# Altium PCB Copy of PCB2.PcbDoc
Units mm, origin at the board's own origin, x right, y up, seen from the top; angles counter-clockwise.
Board outline 80 x 40 mm, 2 copper layers (Top Layer, Bottom Layer); 53 components, 37 nets, 214 pads, 63 vias.
Unrouted connection lines stored in the file: 11.
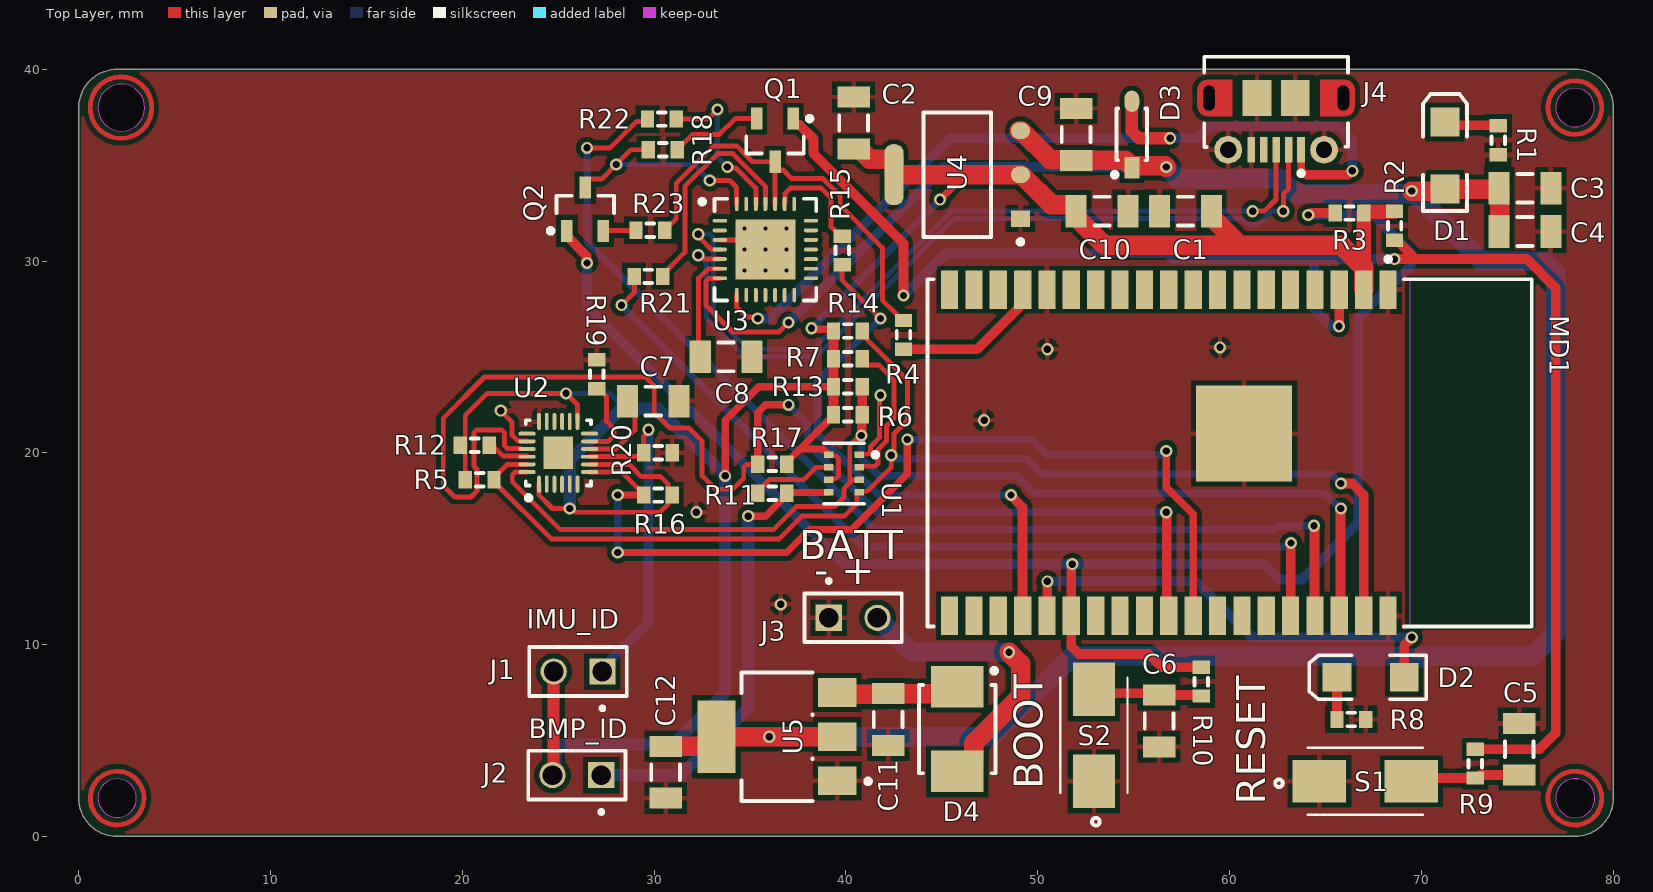
[diagram p0: Top Layer view]
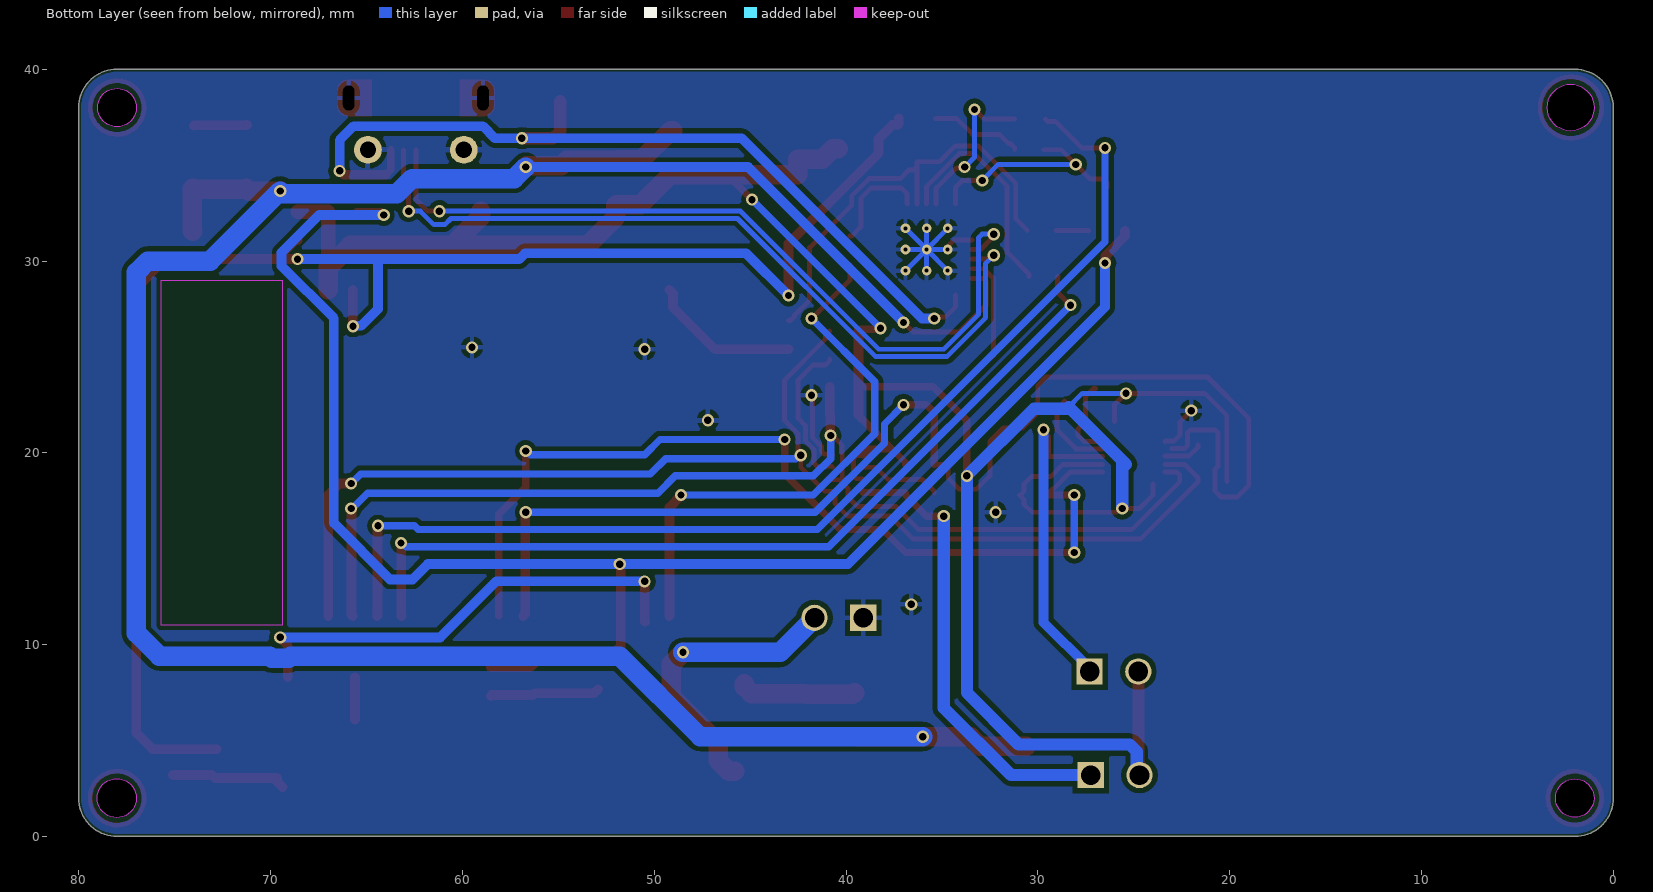
[diagram p1: Bottom Layer view, seen from below]

## Layer stack, top to bottom
Top Solder: solder mask 0.0102, Solder Resist, Dk 3.5
Top Layer: signal copper 0.0356
Dielectric 1: dielectric 0.32, FR-4, Dk 4.8
Bottom Layer: signal copper 0.0356
Bottom Solder: solder mask 0.0102, Solder Resist, Dk 3.5

## Board outline
0,2 ccw(c2,2) 2,0 78,0 ccw(c78,2) 80,2 80,38 ccw(c78,38) 78,40 2,40 ccw(c2,38) 0,38
cut-out: 77,2 ccw(c78.02,2) 78.02,0.98 ccw(c78.02,2) 79.04,2 ccw(c78.02,2) 78.02,3.02 ccw(c78.02,2)
cut-out: 77,38 ccw(c78.005,38) 78.005,36.995 ccw(c78.005,38) 79.01,38 ccw(c78.005,38) 78.005,39.005 ccw(c78.005,38)
cut-out: 1,2 ccw(c2.005,2) 2.005,0.995 ccw(c2.005,2) 3.01,2 ccw(c2.005,2) 2.005,3.005 ccw(c2.005,2)
cut-out: 1,38 ccw(c2.221,38) 2.221,36.779 ccw(c2.221,38) 3.441,38 ccw(c2.221,38) 2.221,39.221 ccw(c2.221,38)

## Design rules (kind name [scope] priority, off if disabled: settings)
BoardOutlineClearance [All] p1: gap=0.127 ignorepadtopadclearanceinfootprint=FALSE except(0: Arc-SplitContinuation Track-SplitContinuation SMDPad-SplitContinuation THPad-SplitContinuation Via-SplitContinuation Fill-SplitContinuation Poly-SplitContinuation Region-SplitContinuation Text-SplitContinuation)
Clearance 5V_Special [InNet('+5')] p1 off: gap=0.254 ignorepadtopadclearanceinfootprint=FALSE except(0: Arc-Hole Track-Hole SMDPad-Hole THPad-Hole Via-Hole Fill-Hole Poly-Hole Region-Hole Text-Hole; 0.508: Arc-Arc Arc-Track Track-Track)
Clearance Vbat_Special [InNet('Vbat')] p2 off: gap=0.254 ignorepadtopadclearanceinfootprint=FALSE except(0: Arc-Hole Track-Hole SMDPad-Hole THPad-Hole Via-Hole Fill-Hole Poly-Hole Region-Hole Text-Hole; 0.508: Arc-Arc Arc-Track Track-Track)
Clearance [All] p3: gap=0.254 ignorepadtopadclearanceinfootprint=FALSE except(0: Arc-Hole Track-Hole SMDPad-Hole THPad-Hole Via-Hole Fill-Hole Poly-Hole Region-Hole Text-Hole; 0.127: Arc-Arc Arc-Track Arc-SMDPad Track-Track Track-SMDPad SMDPad-SMDPad)
MinimumSolderMaskSliver MinimumSolderMaskSliver_1 [All] p1: minsoldermaskwidth=0.025
MinimumSolderMaskSliver [All] p2: minsoldermaskwidth=0.254
PolygonConnect [All] p1: connectstyle=Relief reliefconductorwidth=0.254 reliefentries=4 polygonreliefangle="90 Angle" airgapwidth=0.254
RoomDefinition ESP32WROVER [InComponentClass('ESP32WROVER')] p1: confinementstyle=ConfineOut formatcopy=TRUE lockcomponents=FALSE outline -2.6,28.2 -18.9,28.2 -18.9,40 -2.6,40
RoutingVias RoutingViasS [All] p1: holewidth=0.381 width=0.762 viastyle="Through Hole" minholewidth=0.254 minwidth=0.508 maxholewidth=1.27 maxwidth=1.778
RoutingVias [All] p2: holewidth=0.711 width=1.27 viastyle="Through Hole" minholewidth=0.711 minwidth=1.27 maxholewidth=0.711 maxwidth=1.27
SilkToSolderMaskClearance SilkToSolderMaskClearance_1 [IsPad] p1: minsilkscreentomaskgap=0.076 clearancetoexposedcopper=TRUE
SilkToSolderMaskClearance [IsPad] p2: minsilkscreentomaskgap=0.254 clearancetoexposedcopper=TRUE
SolderMaskExpansion [All] p1: expansion=0.102 istentingtop=FALSE
UnRoutedNet [All] p1: checkbadconnections=TRUE
Width [All] p1: maxlimit=2.54 minlimit=0.254 preferedwidth=0.508
27 further rules are at their usual default settings.

## Components (designator, comment, footprint, x,y, rotation, side; value= is the part's Value field where it differs from the comment)
C1 "Cap Semi" C1206 57.704,32.6 r0 top value=100uF
C2 "Cap Semi" C1206 40.4,37.2 r270 top value=1uF
C3 "Cap Semi" C1206 75.4,33.796 r180 top value=100uF
C4 "Cap Semi" C1206 75.4,31.541 r180 top value=1uF
C5 "Cap Semi" C1206 75.1,4.55 r270 top value=1nF
C6 "Cap Semi" C1206 56.327,6.023 r90 top value=1nF
C7 "Cap Semi" C1206 29.95,22.7 r180 top value=0.1uF
C8 "Cap Semi" C1206 33.75,25 r180 top value=1uF
C9 "Cap Semi" C1206 52,36.6 r270 top value=10uF
C10 "Cap Semi" C1206 53.35,32.6 r180 top value=10uF
C11 "Cap Semi" C1206 42.2,6.1 r90 top value=10uF
C12 "Cap Semi" C1206 30.6,3.35 r90 top value=10uF
D1 "LED2" 3.2X1.6X1.1 71.229,35.5 r90 top
D2 "LED2" 3.2X1.6X1.1 67.35,8.3 r180 top
D3 "MBR0520LT1G" FP-425-04-IPC_B 54.9,36.6 r90 top
D4 "MBRS120T3" ONSC-SMB-2-403A-03_H_V 45.8,5.6 r270 top
J1 "MTSW-101-09-G-D-235" SAMTEC_MTSW-101-09-G-D-235 27.3,8.6 r90 top
J2 "MTSW-101-09-G-D-235" SAMTEC_MTSW-101-09-G-D-235 27.24,3.2 r90 top
J3 "MTSW-101-09-G-D-235" SAMTEC_MTSW-101-09-G-D-235 39.1,11.4 r270 top
J4 "105017-0001" USB-MICRO-B_V 62.425,37.15 r180 top
MD1 "ESP32-WROVER-I" FP-ESP32-WROVER-I-MFG 60,20 r270 top locked
Q1 "QNPN" SOT-23B_N 36.3,36.3 r270 top
Q2 "QNPN" SOT-23B_N 26.4,32.7 r90 top
R1 "Res3" J1-0603 74,36.3 r90 top value=1K
R2 "Res3" J1-0603 68.6,31.844 r270 top value=12K
R3 "Res3" J1-0603 66.25,32.5 r180 top value=5K
R4 "Res3" J1-0603 43,26.15 r270 top value=470
R5 "Res3" J1-0603 20.9,18.6 r180 top value=10K
R6 "Res3" J1-0603 40.1,21.991 r180 top value=10K
R7 "Res3" J1-0603 40.1,24.9 r180 top value=10K
R8 "Res3" J1-0603 66.35,6.1 r180 top value=1K
R9 "Res3" J1-0603 72.8,3.8 r270 top value=470
R10 "Res3" J1-0603 58.527,8.073 r270 top value=470
R11 "Res3" J1-0603 36.15,17.9 r0 top value=10K
R12 "Res3" J1-0603 20.65,20.4 r0 top value=10K
R13 "Res3" J1-0603 40.1,23.446 r180 top value=10K
R14 "Res3" J1-0603 40.1,26.354 r180 top value=10K
R15 "Res3" J1-0603 39.8,30.55 r270 top value=470
R16 "Res3" J1-0603 30.2,17.8 r180 top value=10K
R17 "Res3" J1-0603 36.15,19.4 r180 top value=10K
R18 "Res3" J1-0603 30.45,35.8 r180 top value=12K
R19 "Res3" J1-0603 27,24.1 r90 top value=10K
R20 "Res3" J1-0603 30.2,20 r0 top value=10K
R21 "Res3" J1-0603 29.7,29.2 r0 top value=470
R22 "Res3" J1-0603 30.4,37.4 r0 top value=470
R23 "Res3" J1-0603 29.8,31.6 r0 top value=12K
S1 "147873-2" SW_147873-2 67.075,2.875 r0 top
S2 "147873-2" SW_147873-2 52.927,5.273 r90 top
U1 "BMP280" FP-BMP280-MFG 39.9,18.925 r0 top
U2 "MPU-9250" INSE-QFN-24-1700X1540TP_M 25,20 r90 top locked
U3 "CP2102-GM" SLAB-QFN-28-3125x3125TP_L 35.8,30.6 r0 top
U4 "AMS1117-3.3" FP-AMS1117-IPC_C 45.8,34.5 r180 top
U5 "NCP1117ST50T3G" FP-318H-MFG 36.4,5.2 r180 top

## Footprints (in the part's own frame and the unit in brackets; to place one, negate y for a bottom-side part, rotate by r counter-clockwise, add the part's x,y. Pads: shape width x height; smd on the part's side, far side on the other; paste and mask are expansions set on the pad)
3.2X1.6X1.1 [mm] "SMT LED; 2 Flat Leads"
  rect 1.5x1.5 smd: 1(-1.75,0) 2(1.75,0)
  silkscreen extent -2.9,-1.15 3.2,1.15
C1206 [mm] "Chip Capacitor, Body 3.2x1.6mm, IPC High Density"
  rect 1.1x1.7 smd: 1(-1.35,0) 2(1.35,0)
  silkscreen extent -0.4,-0.75 0.4,0.75, body extent -1.7,-0.9 1.7,0.9, height 1.3
FP-318H-MFG [mm]
  rect 2x1.5 smd paste+0 mask+0: 1(-3.15,2.3) 2(-3.15,0) 3(-3.15,-2.3)
  rect 2x3.8 smd paste+0 mask+0: 4(3.15,0)
  silkscreen extent -4.88,-3.35 1.85,3.35, body extent -4.25,-3.68 4.25,3.68, height 0.25
FP-425-04-IPC_B [mm]
  rect 1.108x0.782 smd paste+0 mask+0: 1(-1.73,0)
  rrect100% 1.108x0.782 smd paste+0 mask+0: 2(1.73,0)
  silkscreen extent -2.22,-0.8 1.35,1.02, body extent -2.53,-1.05 2.53,1.05, height 0.25
FP-AMS1117-IPC_C [mm]
  rect 1.004x0.872 smd paste+0 mask+0: 1(-3.295,2.29)
  rrect100% 1.004x0.872 smd paste+0 mask+0: 2(-3.295,0) 3(-3.295,-2.29)
  rrect87% 1.004x3.182 smd paste+0 mask+0: 4(3.295,0)
  silkscreen extent -3.42,-3.25 1.75,3.62, body extent -3.9,-3.35 3.9,3.35, height 0.25
FP-BMP280-MFG [mm]
  rect 0.5x0.35 smd paste+0 mask+0: 1(0.8,0.975) 2(0.8,0.325) 3(0.8,-0.325) 4(0.8,-0.975) 5(-0.8,-0.975) 6(-0.8,-0.325) 7(-0.8,0.325) 8(-0.8,0.975)
  silkscreen extent -1.05,-1.58 1.75,1.58, body extent -1.55,-1.8 1.55,1.8, height 0.25
FP-ESP32-WROVER-I-MFG [mm]
  rect 2x0.9 smd paste+0 mask+0: 1(-8.5,8.26) 2(-8.5,6.99) 3(-8.5,5.72) 4(-8.5,4.45) 5(-8.5,3.18) 6(-8.5,1.91) 7(-8.5,0.64) 8(-8.5,-0.63) 9(-8.5,-1.9) 10(-8.5,-3.17) 11(-8.5,-4.44) 12(-8.5,-5.71) 13(-8.5,-6.98) 14(-8.5,-8.25) 15(-8.5,-9.52) 16(-8.5,-10.79) 17(-8.5,-12.06) 18(-8.5,-13.33) 19(-8.5,-14.6) 20(8.5,-14.6) 21(8.5,-13.33) 22(8.5,-12.06) 23(8.5,-10.79) 24(8.5,-9.52) 25(8.5,-8.25) 26(8.5,-6.98) 27(8.5,-5.71) 28(8.5,-4.44) 29(8.5,-3.17) 30(8.5,-1.9) 31(8.5,-0.63) 32(8.5,0.64) 33(8.5,1.91) 34(8.5,3.18) 35(8.5,4.45) 36(8.5,5.72) 37(8.5,6.99) 38(8.5,8.26)
  rect 5x5 smd paste+0 mask+0: 39(-1,0.76)
  Keep-Out Layer region: -9,9.4 9,9.4 9,15.7 -9,15.7
  Keep-Out Layer region: -9,9.4 9,9.4 9,15.7 -9,15.7
  silkscreen extent -10.22,-15.75 9.05,15.75, body extent -9.6,-15.85 9.6,15.85, height 0.25
INSE-QFN-24-1700X1540TP_M [mm] "QFN, 24-Leads, Body 3.1x3.1mm, Pitch 0.40mm, Thermal Pad 1.54x1.70mm, IPC Low Density"
  oval 0.9x0.2 smd: 1(-1.632,1) 2(-1.632,0.6) 3(-1.632,0.2) 4(-1.632,-0.2) 5(-1.632,-0.6) 6(-1.632,-1) 13(1.632,-1) 14(1.632,-0.6) 15(1.632,-0.2) 16(1.632,0.2) 17(1.632,0.6) 18(1.632,1)
  oval 0.2x0.9 smd: 7(-1,-1.632) 8(-0.6,-1.632) 9(-0.2,-1.632) 10(0.2,-1.632) 11(0.6,-1.632) 12(1,-1.632) 19(1,1.632) 20(0.6,1.632) 21(0.2,1.632) 22(-0.2,1.632) 23(-0.6,1.632) 24(-1,1.632)
  rect 1.7x1.54 smd: 25(0,0)
  silkscreen extent -2.47,-1.7 1.7,1.7, body extent -1.55,-1.55 1.55,1.55, height 1.05
J1-0603 [mm] "Chip Resistor, Body 1.6x0.8mm, IPC High Density"
  rect 0.7x0.9 smd: 1(-0.75,0) 2(0.75,0)
  silkscreen extent -0.2,-0.35 0.2,0.35, body extent -0.85,-0.48 0.85,0.48, height 0.9
ONSC-SMB-2-403A-03_H_V [mm] "Molded, 2-Leads, Body 4.6x3.95mm"
  rect 2.159x2.743 smd: 1(-2.21,0) 2(2.21,0)
  silkscreen extent -3.16,-2 2.3,2.05, body extent -2.3,-1.97 2.3,1.97, height 2.42
SAMTEC_MTSW-101-09-G-D-235 [mm]
  rect 1.37x1.37 hole 1.02: 01(0,0)
  round 1.37 hole 1.02: 02(0,2.54)
  silkscreen extent -2.02,-1.27 1.27,3.81
SLAB-QFN-28-3125x3125TP_L [mm] "QFN, 28-Leads, Body 5x5mm, Pitch 0.5mm, Thermal Pad 3.13x3.13mm, IPC High Density"
  oval 0.75x0.2 smd: 1(-2.375,1.5) 2(-2.375,1) 3(-2.375,0.5) 4(-2.375,0) 5(-2.375,-0.5) 6(-2.375,-1) 7(-2.375,-1.5) 15(2.375,-1.5) 16(2.375,-1) 17(2.375,-0.5) 18(2.375,0) 19(2.375,0.5) 20(2.375,1) 21(2.375,1.5)
  oval 0.2x0.75 smd: 8(-1.5,-2.375) 9(-1,-2.375) 10(-0.5,-2.375) 11(0,-2.375) 12(0.5,-2.375) 13(1,-2.375) 14(1.5,-2.375) 22(1.5,2.375) 23(1,2.375) 24(0.5,2.375) 25(0,2.375) 26(-0.5,2.375) 27(-1,2.375) 28(-1.5,2.375)
  rect 3.13x3.13 smd: 29(0,0)
  silkscreen extent -3.42,-2.65 2.65,2.65, body extent -2.5,-2.5 2.5,2.5, height 1
SOT-23B_N [mm] "SOT23, 3-Leads, Body 2.9x1.3mm, Pitch 0.95mm, Lead Span 2.4mm, IPC Medium Density"
  rect 1.15x0.6 smd: 1(-1.125,0.95) 2(-1.125,-0.95) 3(1.125,0)
  silkscreen extent -1.25,-1.5 0.7,1.93, body extent -0.7,-1.5 0.7,1.5, height 1.14
SW_147873-2 [mm]
  rect 2.8x2.2 smd: 1(-2.4,0) 2(2.4,0)
  silkscreen extent -4.7,-1.75 3,1.75
USB-MICRO-B_V [mm] "USB, MICRO B, Body 7.491x4.695 mm, Pitch 0.65 mm"
  rect 0.4x1.35 smd: 1(-1.3,1.35) 2(-0.65,1.35) 3(0,1.35) 4(0.65,1.35) 5(1.3,1.35)
  round 1.45 hole 0.85: 6(-2.5,1.35) 7(2.5,1.35)
  rrect50% 0x0 hole 0.6 slot 1.3 at 90 deg: 8(-3.5,-1.35) 11(3.5,-1.35)
  rect 1.5x1.9 smd: 9(-1,-1.35) 10(1,-1.35)
  Top Layer circle w0.5: c-3.6,-1.8 r0.25
  Top Layer circle w0.5: c-3.6,-0.9 r0.25
  Top Layer circle w0.5: c3.6,-1.8 r0.25
  Top Layer circle w0.5: c3.6,-0.9 r0.25
  Top Layer region: -3.6,-1.8 -3.6,-0.9 -4.1,-0.9 -4.1,-1.8
  Top Layer region: 3.6,-0.9 3.6,-1.8 4.1,-1.8 4.1,-0.9
  Top Layer region: 2.3,-0.4 2.3,-2.3 3.6,-2.3 3.6,-0.4
  Top Layer region: -2.3,-2.3 -2.3,-0.4 -3.6,-0.4 -3.6,-2.3
  silkscreen extent -3.75,-3.5 3.75,2.7, body extent -4.1,-3.9 4.1,1.5, height 2.67

## Part data
C1 C2 C3 C4 C5 C6 C7 C8 C9 C10 C11 C12: "Capacitor (Semiconductor SIM Model)", LatestRevisionDate=29-May-2009, LatestRevisionNote="IPC-7351 Footprint Added.", PackageDescription="Chip Capacitor", PackageReference=C1206, Published=8-Jun-2000, Publisher="Altium Limited"
D1 D2: "Typical RED, GREEN, YELLOW, AMBER GaAs LED", LatestRevisionDate=17-Jul-2002, LatestRevisionNote="Re-released for DXP Platform.", PackageDescription="SM LED; 2 Flat Leads", PackageReference=3.2X1.6X1.1, PackageVersion=Feb-2002, Published=8-Jun-2000, Publisher="Altium Limited"
D3: library part CMP-1055-00425-2, "DIODE SCHOTTKY 20V 500MA SOD123", Average Rectified Current=500mA, Case/Package=SOD-123-2, Forward Voltage=385mV, Max Forward Surge Current (Ifsm)=5.5A, Max Operating Temperature=125°C, Max Repetitive Reverse Voltage (Vrrm)=20V, Max Reverse Leakage Current=250uA, Min Operating Temperature=-65°C, Package Quantity=3000, Contact Plating=Tin, Current Rating=500mA, Element Configuration=Single, Forward Current=500mA, Height=1.12mm, Lead Free="Lead Free", Length=2.69mm, Max Reverse Voltage (DC)=20V, Max Surge Current=5.5A, Number of Pins=2, Output Current=500mA, Packaging="Tape and Reel", Peak Non-Repetitive Surge Current=5.5A, Peak Reverse Current=250uA, Polarity=Standard, Radiation Hardening=No, REACH SVHC="No SVHC", Termination=SMD/SMT, Voltage Rating (DC)=20V, Width=1.6mm
D4: library part CMP-1055-00352-1, "Schottky Power Rectifier, 2-Pin SMB, Tape and Reel", Manufacturer="On Semiconductor", ComponentLink1Description="Manufacturer URL", ComponentLink1URL=http://www.onsemi.com/, ComponentLink2Description=Datasheet, ComponentLink2URL=http://www.onsemi.cn/pub_link/Collateral/MBRS120T3-D.PDF, ComponentLink3Description="Package Specification", ComponentLink3URL=http://www.onsemi.com/pub_link/Collateral/1SMB5913BT3-D.PDF, Configuration=Single, DatasheetVersion="Rev. 7", Mounting Technology="Surface Mount", PackageDescription="2-Pin Small Molded Package, J-Bend Lead, Body 4.33 x 3.625 mm", PackageReference=SMB-2-403A-03_H, PackageVersion="Rev. H, 05/2011", Packing="Tape and Reel", PartNumber=MBRS120T3, RoHS=FALSE, IFSM Max (A)=40
J1 J2 J3: Package=None, Availability=Unavailable, MF="{'manufacturer': u'Samtec'}", MP=MTSW-101-09-G-D-235, Price=None
J4: library part CMP-2000-05827-1, "Micro-USB B Receptacle, Right Angle, Bottom Mount, Surface Mount, with Solder Tabs, -30 to 85 degC, 5-Pin USB, RoHS, Tape and Reel", Manufacturer=Molex, Package Description="5-Leads USB, Micro B, Body 7.5 x 5 mm, Pitch 0.65 mm", Package Reference=MICRO-B, Package Version="Rev. F, 12/2012", Standard Package=1, Voltage - Max=30V, 3D Model=105017-0001.stp, Catalog Drawings=1050170001, Category=Connectors,Interconnects, Circuits=5, Connector Type=USB-microB, Datasheet URL=http://www.molex.com/elqNow/elqRedir.htm?ref=http://www.molex.com/webdocs/datasheets/pdf/en-us/1050170001_IO_CONNECTORS.pdf, Datasheet Version=03/2016, Family=USB,DVI,HDMIConnectors, Featured Product=Micro-USBConnectorsUSBConnectors, Features=Shielded,SolderRetention, Gender=Receptacle, Manufacturer URL=http://www.molex.com/, Mating Products=WM17145-ND-CABLEMICROUSBBTOSTDA1.0MWM17147-ND-CABLEMICROUSBBTOSTDA2.0MWM17146-ND-CABLEMICROUSBBTOSTDA1.5M, Mounting Technology=SurfaceMount, Mounting Type=BoardCutout,SurfaceMount,RightAngle, Number of Contacts=5, Online Catalog=Molex-MicroUSB, Other Names=WM1399DKR, Package URL=http://www.molex.com/pdm_docs/sd/1050170001_sd.pdf, Packaging=Digi-Reel®, PCN Assembly/Origin=ResinSupplier21/Oct/2015, RoHS Information=1050170001CertofCompliance, Series=-, Specifications=-, Ingress Protection=-
MD1: library part CMP-194065-000001-1, "SMD MODULE, ESP32-D0WDQ6, 32MBIT", Manufacturer=Espressif, Max Frequency=2484MHz, Max Supply Voltage=3.6V, Min Supply Voltage=2.3V, Nominal Supply Current=500mA, Temperature="-40°C to +85°C", Temperature Range High=+85°C, Temperature Range Low=-40°C, Automotive=No, Category=UNK, ComponentLink2Description=Datasheet, ComponentLink2URL=https://www.espressif.com/sites/default/files/documentation/esp32-wrover_datasheet_en.pdf, Data Rate=150Mbits/s, Device Class L1="Integrated Circuits (ICs)", Device Class L2="RF Semiconductors and Devices", Device Class L3=Transceivers, Digikey Description="SMD MODULE, ESP32-D0WDQ6, 32MBIT", Height=3.4mm, Lead Free=Yes, Manufacturer Part Number=ESP32-WROVER-I, Number Of Adc Channels=16, Number Of Gpio=20, Octopart=https://octopart.com/esp32-wrover-i-espressif+systems-89171349, Package=ESP32-WROVER-I, RoHS=TRUE, Sensitivity=-98dBm, Interface=I2C,SPI,UART,I2S,Other
Q1 Q2: "NPN Bipolar Transistor", LatestRevisionDate=29-May-2009, LatestRevisionNote="IPC-7351 Footprint Added.", PackageDescription="3-Pin SOT-23 Package 0.95 mm Pitch, 2.4 mm Lead Span", PackageReference=SOT-23B, PackageVersion=Aug-1999, Published=8-Jun-2000, Publisher="Altium Limited"
R1 R2 R3 R4 R5 R6 R7 R8 R9 R10 R11 R12 R13 R14 R15 R16 R17 R18 R19 R20 R21 R22 R23: "Resistor", LatestRevisionDate=29-May-2009, LatestRevisionNote="IPC-7351 Footprint Added.", PackageDescription="Chip Resistor", PackageReference=J1-0603, Published=8-Jun-2000, Publisher="Altium Limited"
S1 S2: "SWITCH TACTILE SPST-NO 0.05A 24V", Package=None, Availability=Unavailable, MF="{'manufacturer': u'TE Connectivity'}", MP=147873-2, Price=None
U1: library part CMP-2000-05076-3, "SENSOR PRESSURE ABS", Case/Package=SMD/SMT, Max Operating Temperature=85°C, Min Operating Temperature=-40°C, Operating Pressure=15.95PSI, Lead Free="Lead Free", Max Pressure=290.08PSI, Number of Pins=8, Output Type=SPI, Port Style="No Port", Pressure Type=Absolute, Termination=SMD/SMT
U2: library part CMP-2100-03657-1, "9-axis MotionTracking device, 2.4 to 3,6 V, -40 to 85 degC, 24-Pin QFN, RoHS, Tape and Reel", Case/Package=QFN, Manufacturer=InvenSense, Max Operating Temperature=85degC, Max Supply Voltage=3.6V, Min Operating Temperature=-40degC, Min Supply Voltage=2.4V, Package Description="24-Pin Quad Flat No-lead Package, Body 3 x 3 mm, Pitch 0.4 mm", Package Quantity=1, Package Reference=QFN-24, Datasheet URL=http://datasheet.octopart.com/MPU-9250-InvenSense-datasheet-21859386.pdf, Datasheet Version="Rev. 1.0, 01/2014", Height=1mm, Length=3.1mm, Manufacturer URL=http://www.invensense.com/, Mount=SurfaceMount, RoHSCompliant=true, Width=3.1mm
U3: library part CMP-0511-00012-1, "Single-Chip USB to UART Bridge, 1024 Bytes EEPROM, -40 to 85 degC, 28-pin QFN, Tube", Manufacturer="Silicon Labs", Code_JEDEC=MO-220, Code_IPC=J-STD-020C, ComponentLink1Description="Manufacturer URL", ComponentLink1URL=http://www.silabs.com/, ComponentLink2Description=Datasheet, ComponentLink2URL=http://www.silabs.com/Support%20Documents/TechnicalDocs/CP2102-9.pdf, ComponentLink3Description="Package Specification", ComponentLink3URL=http://www.silabs.com/Support%20Documents/TechnicalDocs/C8051T61x.pdf, DatasheetVersion="Rev. 1.5", EEPROM="1024 Bytes", Mounting Technology="Surface Mount", PackageDescription="28-Pin Quad-Flat No-Leads Package, Body 5 x 5 mm, Pitch 0.5 mm", PackageReference=QFN-28, PartNumber=CP2102-GM, Sub-Family="USB Bridges", Internal Oscillator=TRUE
U4: library part CMP-209535-000001-1, "LDO Voltage Regulators 1A, 3.3V", Dropout Voltage=1.1V, Manufacturer="Advanced Monolithic Systems", Max Junction Temp=+125°C, Max Power Dissipation=1.2W, Max Supply Voltage=15V, Nominal Supply Current=5mA, Output Current=1A, Output Voltage=3.3V, Package=AMS1117, Temperature="-40°C to +125°C", Temperature Range Low=-40°C, Automotive=No, Category=IC, ComponentLink2Description=Datasheet, ComponentLink2URL=http://www.advanced-monolithic.com/pdf/ds1117.pdf, Device Class L1="Integrated Circuits (ICs)", Device Class L2="Power Management ICs", Device Class L3="Voltage Regulators - Linear", Height=1.8mm, Lead Free=Yes, Manufacturer Part Number=AMS1117-3.3, Number Of Outputs=1, Octopart=https://octopart.com/ams1117-3.3-advanced+monolithic+systems-25899300, Output Type=Fixed, RoHS=TRUE, Standoff Height=0.64mm, Temperature Range High=+125°C, Ipc Land Pattern Name=SOT229P700X180-4
U5: library part CMP-0592-00001-4, "IC REG LINEAR 5V 1A SOT223", Case/Package=SOT-223, Dropout Voltage=1.2V, Max Operating Temperature=125°C, Max Output Current=1A, Max Input Voltage=20V, Min Operating Temperature=0°C, Min Input Voltage=3.5V, Nominal Output Voltage=5V, Output Voltage Accuracy=1%, Package Quantity=1, Power Rating=781mW, Quiescent Current=10mA, Input Bias Current=6mA, Accuracy=1%, Contact Plating=Tin, Halogen Free="Halogen Free", Height=1.69mm, Lead Free="Lead Free", Length=6.7mm, Min Current Limit=1A, Number Of Outputs=1, Number of Pins=4, Number of Regulators=1, Output Current=1A, Output Type=Fixed, Output Voltage=5V, Packaging="Tape and Reel", Polarity=Positive, Radiation Hardening=No, REACH SVHC="No SVHC", RoHS Compliant=Yes, Tolerance=1%, Width=3.7mm

## Via types
v1: diameter 0.635, hole 0.381, Top Layer to Bottom Layer, 54 vias
v2: diameter 0.5, hole 0.2, Top Layer to Bottom Layer, 9 vias

## Nets (pads, with @x,y where several pads share a name; then routed paths per layer and width w, separated by ;. In a path a pad name is that pad's centre, name@x,y a point inside that pad or via, vN(x,y) a via of type N, cw(c..) or ccw(c..) an arc to the next point about the centre after c; other vN are vias at no path point)
+3v3: C1.2 C2.2 C10.2 J1.02 J2.02 MD1.2 R2.1 R3.1 R5.2 R6.2 R7.2 R12.1 R13.2 R14.2 R16.1 R17.1 U1.6 U1.8 U2.1 U2.8 U2.13 U4.2 U4.4 | length 143.2
  Top Layer w0.254: R5.2@20.125,18.525 R5.2@20.15,18.5 ; R5.2 R5.2@20.15,18.5 ; U2.1 24,17.8 24.7,17.1 v1(25.6,17.1) 25.703,17.1 25.903,16.9 30.3,16.9 30.727,17.327 30.727,17.577 R16.1 ; U2.13 26,22.5 v1(25.4,23.1) 21.3,23.1 20.15,21.95 R5.2@20.15,18.5 ; U2.8 28.691,19.4 29.329,18.762 30.338,18.762 30.727,18.373 30.727,17.973 R16.1@30.9,17.8 ; U1.6 39.148,18.648 39.455,18.648 39.604,18.797 39.604,19.703 39.455,19.852 39.148,19.852 U1.8
  Top Layer w0.381: v1(33.7,18.8) 33.7,21.7 35.446,23.446 R13.2 ; R17.1 36.9,19.5 37.6,20.2 ; v1(38.2,26.5) 38.249,26.451 39.253,26.451 R14.2 ; U1.8 39.056,19.9 39.04,19.915 39.04,19.961 38.802,20.2 37.6,20.2 ; R6.2 39.35,21.891 39.19,21.732 39.132,21.732 37.6,20.2 ; v1(44.9,33.2) 45.8,34.1 45.8,34.5
  Top Layer w0.508: R6.2 R13.2 R7.2 R14.2
  Top Layer w0.635: J2.02 24.75,3.25 24.75,8.75 J1.02@24.8,8.8
  Top Layer w0.762: 66.995,29.714 66.995,32.495 R3.1 67,32.538 67.031,32.569 R2.1@68.575,32.569
  Top Layer w1.016: C2.2 40.7,35.85 41.249,35.301 42.499,35.301 42.505,35.295 U4.4 45.8,34.5 U4.2 49.149,34.5 50.707,32.942 51.958,32.942 52,32.9 C10.2 52,32.3 53.479,30.821 60.533,30.821 ; C1.2 59.054,32.3 60.533,30.821 ; MD1.2 66.99,29.671 65.84,30.821 60.533,30.821
  Bottom Layer w0.254: 25.4,19.4 25.4,17.403 25.6,17.203 v1(25.6,17.1) ; v1(25.4,23.1) 27.677,23.1 28.477,22.3
  Bottom Layer w0.381: v1(38.2,26.5) v1(44.9,33.2)
  Bottom Layer w0.635: J2.02 24.841,3.341 24.841,4.428 25.213,4.8 31,4.8 33.7,7.5 v1(33.7,18.8) 30.2,22.3 28.477,22.3 ; 25.4,19.4 28.389,22.389 ; v1@25.6,17.203 25.6,19.4
+5: C3.2 C4.2 C9.2 C12.2 D1.1 D3.1 U3.7 U4.3 U5.2 U5.4 | length 139.3
  Top Layer w0.254: U3.7@33.43,29.1 33.427,29.097 32.849,29.097 32.7,28.948 32.7,27.7 34.1,26.3 36.5,26.3 v1(37,26.8)
  Top Layer w0.508: v1(69.5,33.65) v1@69.524,33.674
  Top Layer w1.016: C12.2 33,4.7 33.5,5.2 U5.2@39.3,5.2 ; U4.3@49.045,36.79 49.149,36.79 50.647,35.292 51.958,35.292 C9.2 54.566,35.25 54.851,34.965 56.635,34.965 v1(56.7,34.9) ; v1(69.5,33.65) 71.129,33.65 D1.1@71.275,33.796 ; D1.1 74.008,33.75 74.05,33.792 C3.2 74.075,33.771 74.075,31.566 C4.2
  Bottom Layer w0.508: v1(37,26.8) 45.1,34.9 v1(56.7,34.9)
  Bottom Layer w1.016: v1(36,5.2) 47.6,5.2 51.8,9.4 68.953,9.4 69.053,9.3 69.947,9.3 70.047,9.4 75.8,9.4 77,10.6 77,29.405 76.405,30 73.15,30 v1(69.5,33.65) 69.35,33.5 63.427,33.5 62.627,34.3 57.3,34.3 v1(56.7,34.9)
GND: C1.1 C2.1 C3.1 C4.1 C5.1 C6.1 C7.1 C8.1 C9.1 C10.1 C11.1 C12.1 J3.01 J4.5 J4.6 J4.7 J4.8 J4.9 J4.10 J4.11 MD1.1 MD1.15 MD1.38 MD1.39 R1.1 R8.1 R11.1 R19.2 R20.2 S1.1 S2.1 U1.1 U1.7 U2.18 U2.20 U3.3 U3.29 U4.1 U5.1 | length 22.7
  Top Layer w0.254: v1(22,22.2) 22.581,21.619 22.581,20.936 22.89,20.627 23.341,20.627 U2.20 ; U3.3 34.362,31.1 34.7,30.762 v2(34.7,30.6) ; R11.1 35.4,18 36.004,18.604 37.355,18.604 37.359,18.6 37.8,18.6 38.45,19.25 U1.7 ; U1.1 40.727,19.927 41.129,19.927 41.278,20.076 41.278,20.327 41.739,20.788 41.739,22.939 v1(41.8,23)
  Bottom Layer w0.254: v2(34.7,29.5) v2(35.8,30.6) ; v2(34.7,30.6) v2(35.8,30.6) ; v2(34.7,31.7) v2(35.8,30.6) ; v2(35.8,29.5) v2(35.8,30.6) ; v2(35.8,31.7) v2(35.8,30.6) ; v2(36.9,29.5) v2(35.8,30.6) ; v2(36.9,30.6) v2(35.8,30.6) ; v2(36.9,31.7) v2(35.8,30.6)
  other v1: 36.6,12.1 32.2,16.9 47.2,21.7 50.5,25.4 59.5,25.5
NetC5_2: C5.2 R9.2 S1.2 | length 6
  Top Layer w0.508: S1.2@69.375,2.575 S1.2@69.725,2.925 ; S1.2@69.65,3.05 R9.2 72.9,3.05 73.05,3.2 C5.2
NetC6_2: C6.2 R10.2 S2.2 | length 5.7
  Top Layer w0.508: S2.2 53.128,7.472 56.228,7.472 C6.2 58.478,7.372 R10.2
NetC7_2: C7.2 U2.10 | length 4.4
  Top Layer w0.254: U2.10 28,20.2 29,21.2 29,22.3 C7.2
NetC8_2: C8.2 U3.6 | length 5.5
  Top Layer w0.254: C8.2 32.319,25.081 32.319,29.106 32.813,29.6 U3.6
NetC11_2: C11.2 D4.1 U5.3 | length 6.1
  Top Layer w1.016: U5.3 39.64,7.41 42.16,7.41 C11.2 44.936,7.45 45.3,7.814 D4.1@45.3,7.96
NetD1_2: D1.2 R1.2 | length 2.8
  Top Layer w0.508: D1.2@71.229,37.1 71.254,37.075 73.975,37.075 R1.2
NetD2_1: D2.1 MD1.24 | length 24.6
  Top Layer w0.508: MD1.24@50.48,11.19 50.49,11.2 50.49,13.29 v1(50.5,13.3) ; D2.1 69.1,9.945 69.5,10.345 v1(69.5,10.379)
  Bottom Layer w0.508: v1(50.5,13.3) 58.24,13.3 61.16,10.379 v1(69.5,10.379)
NetD2_2: D2.2 R8.2 | length 2.2
  Top Layer w0.508: R8.2 D2.2
NetJ1_01: J1.01 R20.1 U2.9 | length 17.5
  Top Layer w0.254: U2.9 R20.1@29.45,19.8 ; R20.1 29.45,20.847 29.7,21.097 v1(29.7,21.2)
  Bottom Layer w0.508: J1.01@27.34,8.8 29.7,11.16 v1(29.7,21.2)
NetJ2_01: J2.01 R11.2 U1.5 | length 23.9
  Top Layer w0.381: v1(34.9,16.7) 35.8,16.7 36.9,17.8 R11.2 36.935,17.935 39.084,17.935 U1.5
  Bottom Layer w0.635: J2.01 31.4,3.2 34.9,6.7 v1(34.9,16.7)
NetJ4_2: J4.2 U3.5 | length 42.3
  Top Layer w0.254: v1(32.3,30.3) 32.403,30.3 32.6,30.103 33.427,30.103 U3.5@33.43,30.1 ; v1(62.8,32.6) 62.8,33.5 63.075,33.775 J4.2
  Bottom Layer w0.254: v1(32.3,30.3) 32.719,29.881 32.719,27.042 34.742,25.019 38.458,25.019 45.658,32.219 60.593,32.219 60.911,31.902 61.489,31.902 62.188,32.6 v1(62.8,32.6)
NetJ4_3: J4.3 U3.4 | length 42.3
  Top Layer w0.254: v1(32.3,31.4) 32.373,31.327 32.373,31.215 32.985,30.603 33.427,30.603 U3.4@33.43,30.6 ; v1(61.2,32.6) 61.812,32.6 62.419,33.207 62.419,35.794 J4.3
  Bottom Layer w0.254: v1(32.3,31.4) 32.9,31.4 33.1,31.2 33.1,27.2 34.9,25.4 38.3,25.4 45.5,32.6 v1(61.2,32.6)
NetMD1_3: MD1.3 Q1.1 R2.2 R9.1 | length 82.9
  Top Layer w0.508: Q1.1 37.25,37.15 37.296,37.104 37.571,37.104 38.3,36.375 38.3,35.618 43,30.918 v1(43,28.2) ; v1(65.7,26.6) 65.71,26.61 65.71,28.49 MD1.3 ; v1(68.6,30.1) 69.686,30.1 69.69,30.104 ; R2.2 68.7,31.094 69.69,30.104 ; R9.1 76.15,4.55 77,5.4 77,28.6 75.496,30.104 69.69,30.104
  Bottom Layer w0.508: v1(43,28.2) 45.2,30.4 56.733,30.4 57.033,30.1 64.4,30.1 ; v1(65.7,26.6) 65.676,26.624 65.276,26.624 64.4,27.5 64.4,30.1 ; v1(68.6,30.1) 64.4,30.1
NetMD1_16: MD1.16 R4.2 | length 7.9
  Top Layer w0.508: R4.2 46.829,25.4 49.014,27.585 49.014,28.304 MD1.16
NetMD1_23: MD1.23 R15.2 | length 29
  Top Layer w0.254: R15.2 39.8,29 v1(41.8,27)
  Top Layer w0.508: v1(48.6,17.8) 48.6,17.766 49.205,17.161 49.205,11.505 MD1.23
  Bottom Layer w0.381: v1(41.8,27) 38.5,23.7 38.5,21 41.7,17.8 v1(48.6,17.8)
NetMD1_25: MD1.25 Q2.1 R3.2 R10.1 | length 86.1
  Top Layer w0.508: Q2.1 25.45,31.3 26.476,30.274 26.476,29.924 v1(26.5,29.9) ; v1(51.8,14.2) 51.8,14.166 51.75,14.116 MD1.25 51.75,9.898 52.14,9.508 55.792,9.508 56.479,8.821 58.525,8.821 R10.1 ; v1(64.1,32.4) 64.134,32.4 64.234,32.5 R3.2
  Bottom Layer w0.508: v1(26.5,29.9) 26.5,27.6 39.9,14.2 v1(51.8,14.2) 61.8,14.2 62.6,13.4 63.767,13.4 66.7,16.333 66.7,27.018 69.425,29.744 69.425,30.442 67.467,32.4 v1(64.1,32.4)
NetMD1_29: MD1.29 R17.2 U2.21 | length 67
  Top Layer w0.254: U2.21@23.045,20.227 22.349,20.227 22.2,20.376 22.2,21.051 22.051,21.2 20.749,21.2 20.6,21.051 20.6,19.309 20.754,19.155 20.754,18.003 20.451,17.7 19.6,17.7 19,18.3 19,21.8 21.154,23.954 29.546,23.954 30,23.5 30,22.1 30.8,21.3 31.8,21.3 32.5,20.6 32.5,18.8 33.2,18.1 34.1,18.1 34.669,18.669 34.669,19.251 34.818,19.4 R17.2
  Top Layer w0.381: R17.2 35.4,22.1 35.8,22.5 v1(37,22.5)
  Top Layer w0.508: v1(56.7,16.9) 56.724,16.876 56.724,11.606 MD1.29
  Bottom Layer w0.381: v1(37,22.5) 37.992,21.508 37.992,20.508 41.6,16.9 v1(56.7,16.9)
NetMD1_30: MD1.30 R16.2 U2.7 | length 49.4
  Top Layer w0.254: U2.7 28.3,19 29.177,18.123 29.227,18.123 29.45,17.9 R16.2
  Top Layer w0.381: v1(28.1,14.8) 36.9,14.8 38.1,16 40.3,16 43.2,18.9 v1(43.2,20.7) ; v1(28.1,17.8) R16.2 ; v1(56.7,20.1) 56.7,18.2 58.1,16.8 MD1.30
  Bottom Layer w0.381: v1(28.1,14.8) v1(28.1,17.8) ; v1(43.2,20.7) 49.7,20.7 50.5,19.9 56.431,19.9 56.631,20.1 v1(56.7,20.1)
NetMD1_34: MD1.34 R21.1 | length 45.8
  Top Layer w0.254: v1(28.3,27.7) 28.975,28.375 28.975,29.175 R21.1
  Top Layer w0.508: MD1.34 63.19,11.51 63.19,15.29 v1(63.2,15.3)
  Bottom Layer w0.381: v1(28.3,27.7) 40.9,15.1 62.931,15.1 63.131,15.3 v1(63.2,15.3)
NetMD1_35: MD1.35 R22.1 | length 57.5
  Top Layer w0.254: v1(26.5,35.9) 27.7,35.9 29.068,37.268 29.468,37.268 R22.1@29.6,37.4
  Top Layer w0.508: v1(64.4,16.2) 64.424,16.176 64.424,11.526 MD1.35
  Bottom Layer w0.381: v1(26.5,35.9) 26.5,31 41.5,16 62.3,16 62.5,16.2 v1(64.4,16.2)
NetMD1_36: MD1.36 R6.1 R13.1 U1.3 U2.24 | length 59.9
  Top Layer w0.254: U2.24 22.749,19 22.6,18.851 22.6,18.5 25.1,16 36.2,16 37.4,17.2 39.4,17.2 39.9,17.7 39.9,18.155 40.196,18.451 ; U1.3 40.345,18.6 40.196,18.451 ; v1(40.8,20.9) 40.697,20.9 40.196,20.399 40.196,18.451
  Top Layer w0.508: v1(40.8,20.9) 40.824,20.924 40.824,21.966 R6.1 R13.1 ; MD1.36 65.776,11.556 65.776,17.076 v1(65.8,17.1)
  Bottom Layer w0.381: v1(40.8,20.9) 40.8,19.7 41.7,18.8 48.9,18.8 49.8,17.9 64.95,17.9 65.75,17.1 v1(65.8,17.1)
NetMD1_37: MD1.37 R5.1 R14.1 U1.4 U2.23 | length 66.2
  Top Layer w0.254: U2.23 22.35,19.4 21.65,18.7 R5.1 21.65,18.5 24.65,15.5 36.5,15.5 37.7,16.7 39.9,16.7 40.577,17.377 40.577,17.902 40.625,17.95 U1.4 40.746,17.996 41.11,17.996 42.357,19.243 42.357,19.982 42.501,20.127 42.501,20.989 43.2,21.688 43.2,23.8 41.073,25.927 41.073,26.131 R14.1
  Top Layer w0.508: v1(65.8,18.4) 66.4,18.4 66.99,17.81 MD1.37
  Bottom Layer w0.381: v1(42.357,19.879) 42.426,19.879 42.605,19.7 49.4,19.7 50.2,18.9 65.3,18.9 v1(65.8,18.4)
NetQ1_2: Q1.2 R18.1 | length 4.9
  Top Layer w0.254: R18.1 31.2,35.9 31.423,36.123 31.523,36.123 32,36.6 33.4,36.6 34.225,37.425 Q1.2
NetQ1_3: Q1.3 R4.1 R23.2 U3.24 | length 23.1
  Top Layer w0.254: R23.2 31.15,32.2 31.15,34.05 33.1,36 34.3,36 35.125,35.175 Q1.3 36.3,34.921 36.473,34.748 36.727,34.748 37.175,34.3 38.8,34.3 39.7,33.4 39.7,32.9 41.9,30.7 41.9,27.964 42.677,27.187 42.677,27.123 42.9,26.9 R4.1 ; U3.24@36.3,32.97 Q1.3@36.3,34.9
NetQ2_2: Q2.2 R23.1 | length 1.7
  Top Layer w0.254: Q2.2 27.375,31.6 R23.1
NetQ2_3: Q2.3 R18.2 U3.28 | length 11.9
  Top Layer w0.254: Q2.3 26.4,34.1 26.573,34.273 27.262,34.273 v1(28.025,35.037) 28.788,35.8 R18.2 ; v1(32.9,34.2) 33.936,34.2 34.3,33.836 U3.28@34.3,32.97
  Bottom Layer w0.254: v1(28.025,35.037) 32.063,35.037 v1(32.9,34.2)
NetR7_1: R7.1 U1.2 | length 7.9
  Top Layer w0.254: U1.2 40.748,19.298 41.51,19.298 41.659,19.447 41.659,20.169 42.12,20.63 42.12,21.421 42.5,21.8 42.5,23.8 41.723,24.577 41.073,24.577 40.85,24.8 R7.1
NetR12_2: R12.2 U2.22 | length 2
  Top Layer w0.254: R12.2@21.65,20.4 21.65,20.3 22.123,19.827 U2.22@23.368,19.827
NetR15_1: R15.1 U3.23 | length 5.6
  Top Layer w0.254: U3.23 36.827,33.002 36.827,33.527 37.1,33.8 38.7,33.8 39.221,33.279 39.221,31.779 39.7,31.3 R15.1
NetR19_1: R19.1 U2.11 | length 4.3
  Top Layer w0.254: U2.11 27.6,20.6 27.9,20.9 27.9,21.258 27.516,21.642 27.516,22.934 27.323,23.127 27.1,23.35 R19.1
NetR21_2: R21.2 U3.25 | length 11.7
  Top Layer w0.254: R21.2 30.45,29.3 31.601,30.452 31.601,33.889 33.309,35.597 34.103,35.597 35.8,33.9 U3.25
NetR22_2: R22.2 U3.26 | length 8.3
  Top Layer w0.254: R22.2@31.2,37.4 32.8,37.4 v1(33.3,37.9) ; v1(33.814,34.899) 33.86,34.853 34.247,34.853 35.3,33.8 U3.26 U3.26@35.3,32.97
  Bottom Layer w0.254: v1(33.3,37.9) 33.3,35.412 v1(33.814,34.899)
Vbat: D4.2 J3.02 | length 15.6
  Top Layer w1.016: D4.2 46.092,3.39 46.664,3.962 46.664,4.864 49.1,7.3 49.1,9 v1(48.5,9.6)
  Bottom Layer w1.016: J3.02 43.44,9.6 v1(48.5,9.6)
Vusb: D3.2 J4.1 U3.8 | length 46.6
  Top Layer w0.254: U3.8@34.3,28.23 U3.8 34.3,27.6 34.827,27.073 35.327,27.073 v1(35.4,27)
  Top Layer w0.381: J4.1 63.735,35.79 63.735,34.765 64,34.5
  Top Layer w0.508: 64,34.5 66.166,34.5 66.366,34.7 v1(66.4,34.7)
  Top Layer w0.635: D3.2 54.9,36.772 55.272,36.4 v1(56.9,36.4)
  Bottom Layer w0.508: v1(35.4,27) 36.033,27 45.433,36.4 v1(56.9,36.4) 58.3,36.4 58.933,37.033 65.667,37.033 66.4,36.3 v1(66.4,34.7)
pads on no net: J4.4 MD1.4 MD1.5 MD1.6 MD1.7 MD1.8 MD1.9 MD1.10 MD1.11 MD1.12 MD1.13 MD1.14 MD1.17 MD1.18 MD1.19 MD1.20 MD1.21 MD1.22 MD1.26 MD1.27 MD1.28 MD1.31 MD1.32 MD1.33 U2.2 U2.3 U2.4 U2.5 U2.6 U2.12 U2.14 U2.15 U2.16 U2.17 U2.19 U2.25 U3.1 U3.2 U3.9 U3.10 U3.11 U3.12 U3.13 U3.14 U3.15 U3.16 U3.17 U3.18 U3.19 U3.20 U3.21 U3.22 U3.27
copper on no net: | length 36.5
  Top Layer w0.254: 3.4,2 ccw(c2,2) 3.4,2 ; 3.803,38 ccw(c2.2,38) 3.803,38 ; 79.4,38 ccw(c78,38) 79.4,38 ; 79.404,2 ccw(c78,2) 79.404,2

## Polygon pours and split planes (outlines as drawn)
GND on Top Layer "GND_L01_P000" (solid, pour order 0): 0,2 ccw(c2,2) 2,0 78,0 ccw(c78,2) 80,2 80,38 ccw(c78,38) 78,40 2,40 ccw(c2,38) 0,38
GND on Bottom Layer "GND_L02_P001" (solid, pour order 1): 0,2 ccw(c2,2) 2,0 78,0 ccw(c78,2) 80,2 80,38 ccw(c78,38) 78,40 2,40 ccw(c2,38) 0,38

## Silkscreen, mask and mechanical layers (free items; w line width, h text height)
Top Overlay:
  text "BATT" at 37.554,14.454 h1.52
  text "- +" at 38.354,13.154 h1.52
  text "IMU_ID" at 23.354,10.823 h1.02
  text "BMP_ID" at 23.454,5.123 h1.02
  text "BOOT" at 50.246,2.454 h1.52 r90
  text "RESET" at 61.846,1.654 h1.52 r90

## Text inside footprints (layer, text, board x,y; h text height)
J4: Mechanical 1 "PCB EDGE" at 67.3,40.1 h0.3